# EAGLE board mod_switch_battery_voltage (EAGLE 8.4.1)
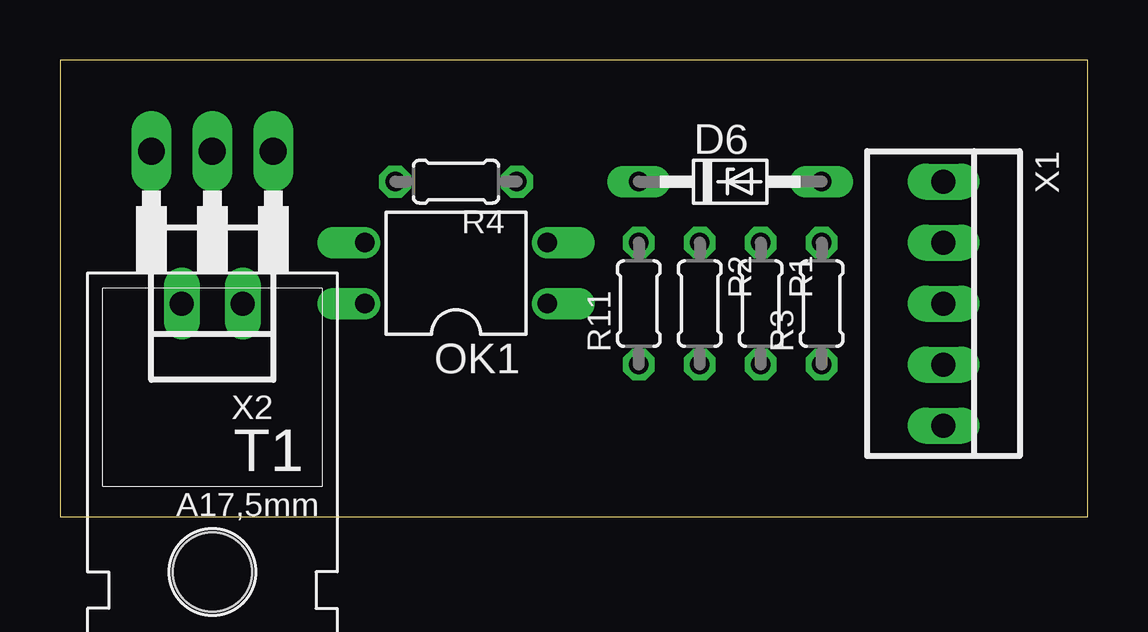
[diagram p0: board, top side]
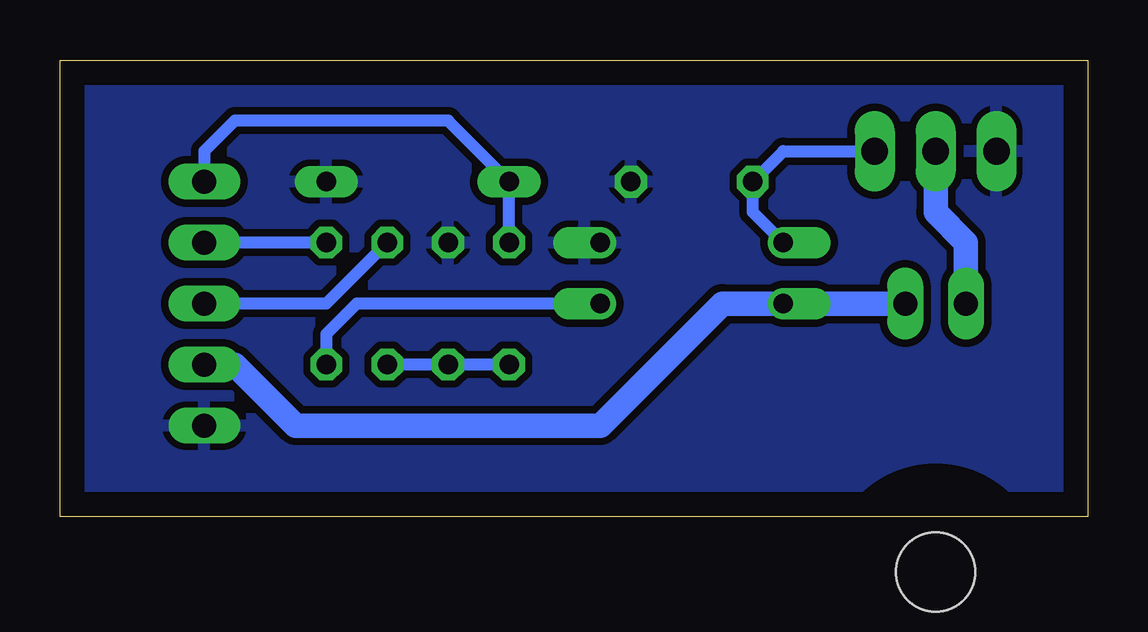
[diagram p1: board, bottom side, seen from below]

Size 42.85 x 19.04 mm. Coordinates in mm from the lower left corner, seen from the top.
Outline: 0,0 42.85,0 42.85,19.04 0,19.04 0,0
Copper layers (1*16): Top 0.035mm / dielectric 1.5mm / Bottom 0.035mm
Design rules "default": minimum track width 6mil, minimum drill 0.35mm, track to track 6mil, track to pad 6mil, pad to pad 6mil, via to via 6mil, smd to smd 6mil, copper to edge 40mil, drill to drill 6mil, minimum pad ring 10mil, minimum via ring 8mil, stop-mask expansion 4mil, vias tented up to drill 0mil, thermal gap 10mil

## Footprints (pad centres in the part's own frame; a part is rotated, then mirrored left to right if it is on the bottom)
DO34Z7 = drill 0.813 long: A 3.81,0; C -3.81,0
DIL04 = drill 0.813 offset: 1 -1.27,-3.81; 2 1.27,-3.81; 3 1.27,3.81; 4 -1.27,3.81
0204/5 = drill 0.813 octagon: 1 -2.54,0; 2 2.54,0
TO220 = drill 1.118 long: 1 -2.54,-6.35; 2 0,-6.35; 3 2.54,-6.35 | hole 3.302: 0,11.176
22-23-2051 = drill 1 long: 1 -5.08,0; 2 -2.54,0; 3 0,0; 4 2.54,0; 5 5.08,0
22-23-2021 = drill 1 long: 1 -1.27,0; 2 1.27,0

## Placement (x,y rotation side)
D6  [DO34Z7]  27.94,13.97 0 top
OK1  PC817  [DIL04]  16.51,10.16 90 top
R1  [0204/5]  29.21,8.89 270 top
R2  [0204/5]  26.67,8.89 270 top
R3  [0204/5]  31.75,8.89 90 top
R4  [0204/5]  16.51,13.97 180 top
R11  [0204/5]  24.13,8.89 90 top
T1  TIP122  [TO220]  6.35,8.89 180 top
X1  22-23-2051  [22-23-2051]  36.83,8.89 270 top
X2  22-23-2021  [22-23-2021]  6.35,8.89 180 top

## Library data of the parts
D6 = diode
OK1 = optocoupler; MPN: PC817X4J000F; OC_FARNELL: 9707727; OC_NEWARK: 97K7059
R1-R4 R11 = resistor
T1 = transistor
X1 = con-molex; MF: MOLEX; MPN: 22-23-2051; OC_FARNELL: 1462952; OC_NEWARK: 38C9178
X2 = con-molex; MF: MOLEX; MPN: 22-23-2021; OC_FARNELL: 1462926; OC_NEWARK: 25C3832

## Nets
12V: OK1.4 X1.4 X2.1
BAT: R1.1 X1.3
GND: D6.A OK1.2 R2.1 R4.1 T1.3 X1.5
N$4: OK1.1 R3.1
N$5: T1.2 X2.2
N$6: R3.2 X1.2
N$7: OK1.3 R4.2 T1.1
N$40: D6.C R11.2 X1.1
N$43: R1.2 R2.2 R11.1

## Tracks (layer width: path | path; a pad name or v marks a point on that pad's centre or on a via)
12V
  Bottom 1.016: X1.4 35.56,6.35 33.02,3.81 20.32,3.81 15.24,8.89 OK1.4 X2.1
BAT
  Bottom 0.508: X1.3 31.75,8.89 R1.1
GND
  pour Bottom (isolate 0.305): -6.35,19.05 27.94,19.05 93.98,19.05 93.98,-3.81 93.98,-60.96 52.07,-60.96 -6.35,-60.96
N$4
  Bottom 0.508: R3.1 31.75,7.62 30.48,8.89 OK1.1
N$5
  Bottom 1.016: T1.2 6.35,12.7 5.08,11.43 X2.2
N$6
  Bottom 0.508: R3.2 X1.2
N$7
  Bottom 0.508: OK1.3 13.97,12.7 R4.2 12.7,15.24 T1.1
N$40
  Bottom 0.508: R11.2 D6.C 26.67,16.51 35.56,16.51 36.83,15.24 X1.1
N$43
  Bottom 0.508: R11.1 R2.2 R1.2